# EAGLE board EIB64-ST4-Multi_initguide (EAGLE 9.4.2)

Size 28.83 x 15.75 mm. Coordinates in mm from the lower left corner, seen from the top.
Outline: 28.83,4.38 14.86,4.38 10.48,0 5.31,0 0,5.31 0,15.55 0.19,15.75 28.12,15.75 28.83,15.04 28.83,4.38
Copper layers (1*16): Top 0.012mm / dielectric 1.55mm / Bottom 0.012mm
Design rules "Multi-CB_2L_075um-Tracks_OL35um": minimum track width 0.075mm, minimum drill 0.1mm, track to track 0.085mm, track to pad 0.085mm, pad to pad 0.085mm, via to via 0.085mm, smd to smd 0mil, copper to edge 0.2mm, drill to drill 0.2mm, minimum pad ring 0.125mm, minimum via ring 0.075mm, stop-mask expansion 2mil, vias tented up to drill 0.45mm, thermal gap 0.2mm
Net classes: 1 thick: width 0.102 mm
Holes 0.1 mm at 10.03,6.93 10.33,6.83 10.23,7.18 9.83,6.68 9.83,7.18 10.13,6.58 10.53,7.08 10.63,6.78 9.53,7.08 9.53,6.78 9.58,7.38 9.28,7.28 9.23,6.98 9.24,6.68 10.03,7.43 9.78,7.63 9.38,7.63 9.43,9.47 9.65,9.27 9.23,9.24 9.65,9.67 10.43,7.42 8.68,5.68 9,5.54 11.28,6.13 11.68,6.53 11.28,6.93 10.98,6.25 11.58,6.83 11.58,6.24 10.88,6.54 10.99,6.82 8.97,9.41 8.76,9.63 8.78,9.93 9,10.14 9.3,10.14 9.54,9.95 9.09,7.52 9.14,7.82 9.42,7.94 9.18,8.12 9.74,7.94 9.59,8.21 10.83,7.13 10.73,7.42 10.58,7.68 10.28,7.7 10.45,7.97 10.04,7.88 10.19,8.15 9.89,8.21 8.99,7.16 9.47,6.47 9.77,6.38 10.07,6.26 9.08,5.24 8.95,4.97 9.24,4.97 9.38,5.24 9.3,5.54 9.14,5.82 8.85,5.93 8.55,5.96 8.28,5.43 8.68,4.8 11.58,2.43 11.58,2.73 11.85,2.58 11.85,2.28 11.58,2.13 11.31,2.28 11.31,2.58 8.58,3.13 9.12,1.45 6.53,6.93 6.23,6.83 6.33,7.18 6.73,6.68 6.73,7.18 6.43,6.58 6.03,7.08 5.93,6.78 7.03,7.08 7.03,6.78 6.98,7.38 7.28,7.28 7.33,6.98 7.31,6.68 6.53,7.43 6.78,7.63 7.18,7.63 7.13,9.47 6.9,9.27 7.33,9.24 6.9,9.67 6.13,7.42 7.88,5.68 7.55,5.54 5.28,6.13 4.88,6.53 5.28,6.93 5.58,6.25 4.98,6.83 4.98,6.24 5.68,6.54 5.56,6.82 7.58,9.41 7.79,9.63 7.78,9.93 7.55,10.14 7.25,10.14 7.01,9.95 7.46,7.52 7.42,7.82 7.13,7.94 7.37,8.12 6.82,7.94 6.97,8.21 5.72,7.13 5.83,7.42 5.98,7.68 6.28,7.7 6.11,7.97 6.52,7.88 6.37,8.15 6.67,8.21 7.57,7.16 7.09,6.47 6.79,6.38 6.49,6.26 7.48,5.24 7.61,4.97 7.31,4.97 7.18,5.24 7.25,5.54 7.42,5.81 7.7,5.93 8,5.96 8.27,5.81 7.87,4.8 4.98,2.43 4.98,2.73 4.71,2.58 4.71,2.28 4.98,2.13 5.25,2.28 5.25,2.58 7.98,3.13 7.44,1.45
Holes 0.3 mm at 9.15,9.77 8.68,5.28 11.28,6.53 8.58,3.53 8.88,1.13 7.4,9.77 7.88,5.28 5.28,6.53 7.98,3.53 7.68,1.13 8.28,4.93

## Footprints (pad centres in the part's own frame; a part is rotated, then mirrored left to right if it is on the bottom)
ST4-40-1.00-X-D_BPADS = smd 0.23 x 1.2: 1 -7.8,1.71; 2 -7.8,-1.71; 3 -7.4,1.71; 4 -7.4,-1.71; 5 -7,1.71; 6 -7,-1.71; 7 -6.6,1.71; 8 -6.6,-1.71; 9 -6.2,1.71; 10 -6.2,-1.71; 11 -5.8,1.71; 12 -5.8,-1.71; 13 -5.4,1.71; 14 -5.4,-1.71; 15 -5,1.71; 16 -5,-1.71; 17 -4.6,1.71; 18 -4.6,-1.71; 19 -4.2,1.71; 20 -4.2,-1.71; 21 -3.8,1.71; 22 -3.8,-1.71; 23 -3.4,1.71; 24 -3.4,-1.71; 25 -3,1.71; 26 -3,-1.71; 27 -2.6,1.71; 28 -2.6,-1.71; 29 -2.2,1.71; 30 -2.2,-1.71; 31 -1.8,1.71; 32 -1.8,-1.71; 33 -1.4,1.71; 34 -1.4,-1.71; 35 -1,1.71; 36 -1,-1.71; 37 -0.6,1.71; 38 -0.6,-1.71; 39 -0.2,1.71; 40 -0.2,-1.71; 41 0.2,1.71; 42 0.2,-1.71; 43 0.6,1.71; 44 0.6,-1.71; 45 1,1.71; 46 1,-1.71; 47 1.4,1.71; 48 1.4,-1.71; 49 1.8,1.71; 50 1.8,-1.71; 51 2.2,1.71; 52 2.2,-1.71; 53 2.6,1.71; 54 2.6,-1.71; 55 3,1.71; 56 3,-1.71; 57 3.4,1.71; 58 3.4,-1.71; 59 3.8,1.71; 60 3.8,-1.71; 61 4.2,1.71; 62 4.2,-1.71; 63 4.6,1.71; 64 4.6,-1.71; 65 5,1.71; 66 5,-1.71; 67 5.4,1.71; 68 5.4,-1.71; 69 5.8,1.71; 70 5.8,-1.71; 71 6.2,1.71; 72 6.2,-1.71; 73 6.6,1.71; 74 6.6,-1.71; 75 7,1.71; 76 7,-1.71; 77 7.4,1.71; 78 7.4,-1.71; 79 7.8,1.71; 80 7.8,-1.71
EIB-GND-HOLE-PAD-SMALL = drill 0.4 pad 0.41 long: P$1 0,0
EIB-TETRODE-HOLE-RS-PAD = drill 0.2 pad 0.58: P$1 0,0

## Placement (x,y rotation side)
J1  ST4-40-1.00-X-D_BPADS  [ST4-40-1.00-X-D_BPADS]  31.14,42.84 180 top  (outside the outline)
U$1  EIB-GND-HOLE-PAD-SMALL  [EIB-GND-HOLE-PAD-SMALL]  31.61,23.27 0 top  (outside the outline)
U$3  EIB-GND-HOLE-PAD-SMALL  [EIB-GND-HOLE-PAD-SMALL]  32.49,27.48 0 top  (outside the outline)
U$5  EIB-TETRODE-HOLE-RS-PAD  [EIB-TETRODE-HOLE-RS-PAD]  60.62,62.58 0 top  (outside the outline)
U$6  EIB-TETRODE-HOLE-RS-PAD  [EIB-TETRODE-HOLE-RS-PAD]  69.25,67.84 0 top  (outside the outline)
U$7  EIB-TETRODE-HOLE-RS-PAD  [EIB-TETRODE-HOLE-RS-PAD]  59.19,95.21 0 top  (outside the outline)
U$8  EIB-TETRODE-HOLE-RS-PAD  [EIB-TETRODE-HOLE-RS-PAD]  71.95,95 0 top  (outside the outline)
U$9  EIB-TETRODE-HOLE-RS-PAD  [EIB-TETRODE-HOLE-RS-PAD]  60.62,57.58 0 top  (outside the outline)
U$10  EIB-TETRODE-HOLE-RS-PAD  [EIB-TETRODE-HOLE-RS-PAD]  60.62,55.08 0 top  (outside the outline)
U$11  EIB-TETRODE-HOLE-RS-PAD  [EIB-TETRODE-HOLE-RS-PAD]  60.62,52.58 0 top  (outside the outline)
U$12  EIB-TETRODE-HOLE-RS-PAD  [EIB-TETRODE-HOLE-RS-PAD]  60.62,50.08 0 top  (outside the outline)
U$13  EIB-TETRODE-HOLE-RS-PAD  [EIB-TETRODE-HOLE-RS-PAD]  60.62,47.58 0 top  (outside the outline)
U$14  EIB-TETRODE-HOLE-RS-PAD  [EIB-TETRODE-HOLE-RS-PAD]  60.62,45.08 0 top  (outside the outline)
U$15  EIB-TETRODE-HOLE-RS-PAD  [EIB-TETRODE-HOLE-RS-PAD]  60.62,42.58 0 top  (outside the outline)
U$16  EIB-TETRODE-HOLE-RS-PAD  [EIB-TETRODE-HOLE-RS-PAD]  60.62,40.08 0 top  (outside the outline)
U$17  EIB-TETRODE-HOLE-RS-PAD  [EIB-TETRODE-HOLE-RS-PAD]  60.62,37.58 0 top  (outside the outline)
U$18  EIB-TETRODE-HOLE-RS-PAD  [EIB-TETRODE-HOLE-RS-PAD]  60.62,35.08 293.7 top  (outside the outline)
U$19  EIB-TETRODE-HOLE-RS-PAD  [EIB-TETRODE-HOLE-RS-PAD]  60.62,32.58 90 top  (outside the outline)
U$20  EIB-TETRODE-HOLE-RS-PAD  [EIB-TETRODE-HOLE-RS-PAD]  60.62,30.07 0 top  (outside the outline)
U$21  EIB-TETRODE-HOLE-RS-PAD  [EIB-TETRODE-HOLE-RS-PAD]  60.62,27.57 0 top  (outside the outline)
U$22  EIB-TETRODE-HOLE-RS-PAD  [EIB-TETRODE-HOLE-RS-PAD]  60.62,25.07 0 top  (outside the outline)
U$23  EIB-TETRODE-HOLE-RS-PAD  [EIB-TETRODE-HOLE-RS-PAD]  60.05,95.21 0 top  (outside the outline)
U$24  EIB-TETRODE-HOLE-RS-PAD  [EIB-TETRODE-HOLE-RS-PAD]  64.19,95.21 0 top  (outside the outline)
U$25  EIB-TETRODE-HOLE-RS-PAD  [EIB-TETRODE-HOLE-RS-PAD]  66.69,95.21 0 top  (outside the outline)
U$26  EIB-TETRODE-HOLE-RS-PAD  [EIB-TETRODE-HOLE-RS-PAD]  59.19,92.71 0 top  (outside the outline)
U$27  EIB-TETRODE-HOLE-RS-PAD  [EIB-TETRODE-HOLE-RS-PAD]  61.69,92.71 0 top  (outside the outline)
U$28  EIB-TETRODE-HOLE-RS-PAD  [EIB-TETRODE-HOLE-RS-PAD]  64.19,92.71 0 top  (outside the outline)
U$29  EIB-TETRODE-HOLE-RS-PAD  [EIB-TETRODE-HOLE-RS-PAD]  66.69,92.71 0 top  (outside the outline)
U$30  EIB-TETRODE-HOLE-RS-PAD  [EIB-TETRODE-HOLE-RS-PAD]  59.19,90.21 0 top  (outside the outline)
U$31  EIB-TETRODE-HOLE-RS-PAD  [EIB-TETRODE-HOLE-RS-PAD]  61.69,90.21 0 top  (outside the outline)
U$32  EIB-TETRODE-HOLE-RS-PAD  [EIB-TETRODE-HOLE-RS-PAD]  64.19,90.21 0 top  (outside the outline)
U$33  EIB-TETRODE-HOLE-RS-PAD  [EIB-TETRODE-HOLE-RS-PAD]  66.69,90.21 0 top  (outside the outline)
U$34  EIB-TETRODE-HOLE-RS-PAD  [EIB-TETRODE-HOLE-RS-PAD]  59.19,87.71 0 top  (outside the outline)
U$35  EIB-TETRODE-HOLE-RS-PAD  [EIB-TETRODE-HOLE-RS-PAD]  61.69,87.71 0 top  (outside the outline)
U$36  EIB-TETRODE-HOLE-RS-PAD  [EIB-TETRODE-HOLE-RS-PAD]  64.19,87.71 0 top  (outside the outline)
U$37  EIB-TETRODE-HOLE-RS-PAD  [EIB-TETRODE-HOLE-RS-PAD]  71.75,67.84 0 top  (outside the outline)
U$38  EIB-TETRODE-HOLE-RS-PAD  [EIB-TETRODE-HOLE-RS-PAD]  74.25,67.84 0 top  (outside the outline)
U$39  EIB-TETRODE-HOLE-RS-PAD  [EIB-TETRODE-HOLE-RS-PAD]  76.75,67.84 0 top  (outside the outline)
U$40  EIB-TETRODE-HOLE-RS-PAD  [EIB-TETRODE-HOLE-RS-PAD]  69.25,65.34 0 top  (outside the outline)
U$41  EIB-TETRODE-HOLE-RS-PAD  [EIB-TETRODE-HOLE-RS-PAD]  71.75,65.34 0 top  (outside the outline)
U$42  EIB-TETRODE-HOLE-RS-PAD  [EIB-TETRODE-HOLE-RS-PAD]  74.25,65.34 0 top  (outside the outline)
U$43  EIB-TETRODE-HOLE-RS-PAD  [EIB-TETRODE-HOLE-RS-PAD]  76.75,65.34 0 top  (outside the outline)
U$44  EIB-TETRODE-HOLE-RS-PAD  [EIB-TETRODE-HOLE-RS-PAD]  69.25,62.84 0 top  (outside the outline)
U$45  EIB-TETRODE-HOLE-RS-PAD  [EIB-TETRODE-HOLE-RS-PAD]  71.75,62.84 0 top  (outside the outline)
U$46  EIB-TETRODE-HOLE-RS-PAD  [EIB-TETRODE-HOLE-RS-PAD]  74.25,62.84 0 top  (outside the outline)
U$47  EIB-TETRODE-HOLE-RS-PAD  [EIB-TETRODE-HOLE-RS-PAD]  76.75,62.84 0 top  (outside the outline)
U$48  EIB-TETRODE-HOLE-RS-PAD  [EIB-TETRODE-HOLE-RS-PAD]  69.25,60.34 0 top  (outside the outline)
U$49  EIB-TETRODE-HOLE-RS-PAD  [EIB-TETRODE-HOLE-RS-PAD]  71.75,60.34 0 top  (outside the outline)
U$50  EIB-TETRODE-HOLE-RS-PAD  [EIB-TETRODE-HOLE-RS-PAD]  74.25,60.34 0 top  (outside the outline)
U$51  EIB-TETRODE-HOLE-RS-PAD  [EIB-TETRODE-HOLE-RS-PAD]  76.62,60.2 0 top  (outside the outline)
U$52  EIB-TETRODE-HOLE-RS-PAD  [EIB-TETRODE-HOLE-RS-PAD]  78.31,59.87 0 top  (outside the outline)
U$53  EIB-TETRODE-HOLE-RS-PAD  [EIB-TETRODE-HOLE-RS-PAD]  74.45,95 0 top  (outside the outline)
U$54  EIB-TETRODE-HOLE-RS-PAD  [EIB-TETRODE-HOLE-RS-PAD]  76.95,95 0 top  (outside the outline)
U$55  EIB-TETRODE-HOLE-RS-PAD  [EIB-TETRODE-HOLE-RS-PAD]  79.45,95 0 top  (outside the outline)
U$56  EIB-TETRODE-HOLE-RS-PAD  [EIB-TETRODE-HOLE-RS-PAD]  71.95,92.5 0 top  (outside the outline)
U$57  EIB-TETRODE-HOLE-RS-PAD  [EIB-TETRODE-HOLE-RS-PAD]  74.45,92.5 0 top  (outside the outline)
U$58  EIB-TETRODE-HOLE-RS-PAD  [EIB-TETRODE-HOLE-RS-PAD]  76.95,92.5 0 top  (outside the outline)
U$59  EIB-TETRODE-HOLE-RS-PAD  [EIB-TETRODE-HOLE-RS-PAD]  79.45,92.5 0 top  (outside the outline)
U$60  EIB-TETRODE-HOLE-RS-PAD  [EIB-TETRODE-HOLE-RS-PAD]  71.95,90 0 top  (outside the outline)
U$61  EIB-TETRODE-HOLE-RS-PAD  [EIB-TETRODE-HOLE-RS-PAD]  74.45,90 0 top  (outside the outline)
U$62  EIB-TETRODE-HOLE-RS-PAD  [EIB-TETRODE-HOLE-RS-PAD]  76.95,90 0 top  (outside the outline)
U$63  EIB-TETRODE-HOLE-RS-PAD  [EIB-TETRODE-HOLE-RS-PAD]  79.45,90 0 top  (outside the outline)
U$64  EIB-TETRODE-HOLE-RS-PAD  [EIB-TETRODE-HOLE-RS-PAD]  71.95,87.5 0 top  (outside the outline)
U$65  EIB-TETRODE-HOLE-RS-PAD  [EIB-TETRODE-HOLE-RS-PAD]  74.45,87.5 0 top  (outside the outline)
U$66  EIB-TETRODE-HOLE-RS-PAD  [EIB-TETRODE-HOLE-RS-PAD]  76.95,87.5 0 top  (outside the outline)
U$67  EIB-TETRODE-HOLE-RS-PAD  [EIB-TETRODE-HOLE-RS-PAD]  79.45,87.5 0 top  (outside the outline)
U$68  EIB-TETRODE-HOLE-RS-PAD  [EIB-TETRODE-HOLE-RS-PAD]  72.02,85.76 0 top  (outside the outline)

## Library data of the parts
J1 = ST4-40-1.00-X-D_custom
U$1 U$3 U$5-U$68 = EIBLibrary

## Nets
N$2: J1.35 U$7.P$1
N$3: J1.36 U$5.P$1
N$4: J1.34 U$9.P$1
N$5: J1.20 U$16.P$1
N$6: J1.22 U$15.P$1
N$7: J1.24 U$14.P$1
N$8: J1.26 U$13.P$1
N$9: J1.28 U$12.P$1
N$11: J1.2 J1.4 J1.6 J1.75 J1.77 J1.79 U$3.P$1
N$12: J1.1 J1.3 J1.5 J1.76 J1.78 J1.80 U$1.P$1
N$13: J1.30 U$11.P$1
N$14: J1.41 U$8.P$1
N$15: J1.32 U$10.P$1
N$16: J1.74 U$52.P$1
N$17: J1.18 U$17.P$1
N$18: J1.16 U$18.P$1
N$19: J1.14 U$19.P$1
N$20: J1.12 U$20.P$1
N$21: J1.10 U$21.P$1
N$22: J1.8 U$22.P$1
N$23: J1.33 U$23.P$1
N$24: J1.31 U$24.P$1
N$25: J1.29 U$25.P$1
N$26: J1.27 U$26.P$1
N$27: J1.25 U$27.P$1
N$28: J1.23 U$28.P$1
N$29: J1.21 U$29.P$1
N$30: J1.19 U$30.P$1
N$31: J1.17 U$31.P$1
N$32: J1.15 U$32.P$1
N$33: J1.13 U$33.P$1
N$34: J1.11 U$34.P$1
N$35: J1.9 U$35.P$1
N$36: J1.7 U$36.P$1
N$37: J1.72 U$51.P$1
N$38: J1.70 U$50.P$1
N$39: J1.68 U$49.P$1
N$40: J1.66 U$48.P$1
N$41: J1.64 U$47.P$1
N$42: J1.62 U$46.P$1
N$43: J1.60 U$45.P$1
N$44: J1.58 U$44.P$1
N$45: J1.56 U$43.P$1
N$46: J1.54 U$42.P$1
N$47: J1.52 U$41.P$1
N$48: J1.50 U$40.P$1
N$49: J1.48 U$39.P$1
N$50: J1.46 U$38.P$1
N$51: J1.44 U$37.P$1
N$52: J1.42 U$6.P$1
N$53: J1.43 U$53.P$1
N$54: J1.45 U$54.P$1
N$55: J1.47 U$55.P$1
N$56: J1.49 U$56.P$1
N$57: J1.51 U$57.P$1
N$58: J1.53 U$58.P$1
N$59: J1.55 U$59.P$1
N$60: J1.57 U$60.P$1
N$61: J1.59 U$61.P$1
N$62: J1.61 U$62.P$1
N$63: J1.63 U$63.P$1
N$64: J1.65 U$64.P$1
N$65: J1.67 U$65.P$1
N$66: J1.69 U$66.P$1
N$67: J1.71 U$67.P$1
N$68: J1.73 U$68.P$1

## Tracks (layer width: path | path; a pad name or v marks a point on that pad's centre or on a via)
N$2  (1 unrouted)
N$3  (1 unrouted)
N$4  (1 unrouted)
N$5  (1 unrouted)
N$6  (1 unrouted)
N$7  (1 unrouted)
N$8  (1 unrouted)
N$9  (1 unrouted)
N$11  (6 unrouted)
N$12  (6 unrouted)
N$13  (1 unrouted)
N$14  (1 unrouted)
N$15  (1 unrouted)
N$16  (1 unrouted)
N$17  (1 unrouted)
N$18  (1 unrouted)
N$19  (1 unrouted)
N$20  (1 unrouted)
N$21  (1 unrouted)
N$22  (1 unrouted)
N$23  (1 unrouted)
N$24  (1 unrouted)
N$25  (1 unrouted)
N$26  (1 unrouted)
N$27  (1 unrouted)
N$28  (1 unrouted)
N$29  (1 unrouted)
N$30  (1 unrouted)
N$31  (1 unrouted)
N$32  (1 unrouted)
N$33  (1 unrouted)
N$34  (1 unrouted)
N$35  (1 unrouted)
N$36  (1 unrouted)
N$37  (1 unrouted)
N$38  (1 unrouted)
N$39  (1 unrouted)
N$40  (1 unrouted)
N$41  (1 unrouted)
N$42  (1 unrouted)
N$43  (1 unrouted)
N$44  (1 unrouted)
N$45  (1 unrouted)
N$46  (1 unrouted)
N$47  (1 unrouted)
N$48  (1 unrouted)
N$49  (1 unrouted)
N$50  (1 unrouted)
N$51  (1 unrouted)
N$52  (1 unrouted)
N$53  (1 unrouted)
N$54  (1 unrouted)
N$55  (1 unrouted)
N$56  (1 unrouted)
N$57  (1 unrouted)
N$58  (1 unrouted)
N$59  (1 unrouted)
N$60  (1 unrouted)
N$61  (1 unrouted)
N$62  (1 unrouted)
N$63  (1 unrouted)
N$64  (1 unrouted)
N$65  (1 unrouted)
N$66  (1 unrouted)
N$67  (1 unrouted)
N$68  (1 unrouted)

## Text on the board
ref-old: * | * | * | * | * | * | * | *